# EAGLE board DIY_Keyboard_V1 (EAGLE 9.1.0)

Size 322 x 94 mm. Coordinates in mm from the lower left corner, seen from the top.
Outline: 0,0 322,0 322,94 0,94 0,0
Copper layers (1*16): Top 0.035mm / dielectric 1.5mm / Bottom 0.035mm
Design rules "SparkFun-2-layer-STANDARD *": minimum track width 10mil, minimum drill 20mil, track to track 10mil, track to pad 6mil, pad to pad 6mil, via to via 10mil, smd to smd 8mil, copper to edge 8mil, drill to drill 8mil, minimum pad ring 10mil, minimum via ring 10mil, stop-mask expansion 4mil, vias tented up to drill 20mil, thermal gap 10mil

## Footprints (pad centres in the part's own frame; a part is rotated, then mirrored left to right if it is on the bottom)
QFP80P1200X1200X120-44N = smd 1.473 x 0.508: 1 -5.74,3.988; 2 -5.74,3.2; 3 -5.74,2.388; 4 -5.74,1.6; 5 -5.74,0.787; 6 -5.74,0; 7 -5.74,-0.787; 8 -5.74,-1.6; 9 -5.74,-2.388; 10 -5.74,-3.2; 11 -5.74,-3.988; 23 5.74,-3.988; 24 5.74,-3.2; 25 5.74,-2.388; 26 5.74,-1.6; 27 5.74,-0.787; 28 5.74,0; 29 5.74,0.787; 30 5.74,1.6; 31 5.74,2.388; 32 5.74,3.2; 33 5.74,3.988 | smd 0.508 x 1.473: 12 -3.988,-5.74; 13 -3.2,-5.74; 14 -2.388,-5.74; 15 -1.6,-5.74; 16 -0.787,-5.74; 17 0,-5.74; 18 0.787,-5.74; 19 1.6,-5.74; 20 2.388,-5.74; 21 3.2,-5.74; 22 3.988,-5.74; 34 3.988,5.74; 35 3.2,5.74; 36 2.388,5.74; 37 1.6,5.74; 38 0.787,5.74; 39 0,5.74; 40 -0.787,5.74; 41 -1.6,5.74; 42 -2.388,5.74; 43 -3.2,5.74; 44 -3.988,5.74
0603 = smd 1.1 x 1: 1 -0.85,0; 2 0.85,0
SOD-323 = smd 0.63 x 0.83: A 1.15,0; C -1.15,0
LED-0603 = smd 1 x 1: A -0.877,0; C 0.877,0
2X3 = drill 1.016 pad 1.88: 1 0,0; 2 0,2.54; 3 2.54,0; 4 2.54,2.54; 5 5.08,0; 6 5.08,2.54
CHERRY-MX-LED = drill 1.092 pad 2.032: A -1.27,-5.08; K 1.27,-5.08 | drill 1.753 pad 3.226: S1 -3.81,2.54; S2 2.54,5.08 | hole 4.089: 0,0 | hole 1.707: -5.08,0; 5.08,0
USB_TYPE_C = smd 0.6 x 1.45: A1B12GND -3.25,5.095; A4B9VBUS -2.45,5.095; A9B4VBUS 2.45,5.095; A12B1GND 3.25,5.095 | smd 0.3 x 1.45: A5 -1.25,5.095; A6 -0.25,5.095; A7 0.25,5.095; A8 1.25,5.095; B5 1.75,5.095; B6 0.75,5.095; B7 -0.75,5.095; B8 -1.75,5.095 | drill 0.6 long: P$1 -4.32,0; P$2 4.32,0 | drill 0.6 pad 1 long: P$3 -4.32,4.18; P$4 4.32,4.18 | hole 0.65: -2.89,3.65; 2.89,3.65
CRYSTAL-SMD-5X3.2-4PAD = smd 1.9 x 1.1: 1 -1.85,-1.15; 2 1.85,-1.15; 3 1.85,1.15; 4 -1.85,1.15

## Placement (x,y rotation side)
ATMEGA32U4-AU  ATMEGA32U4-AU  [QFP80P1200X1200X120-44N]  104.73,47 0 top
C1  1.0uF  [0603]  117.5,31 0 top
C2  10pF  [0603]  117.5,28.5 0 top
C3  10pF  [0603]  117.5,26 0 top
D1  250mA/100V  [SOD-323]  313,75.5 0 top
D2  250mA/100V  [SOD-323]  294,75.5 0 top
D3  250mA/100V  [SOD-323]  275,75.5 0 top
D4  250mA/100V  [SOD-323]  256,75.5 0 top
D5  250mA/100V  [SOD-323]  237,75.5 0 top
D6  250mA/100V  [SOD-323]  218,75.5 0 top
D7  250mA/100V  [SOD-323]  199,75.5 0 top
D8  250mA/100V  [SOD-323]  180,75.5 0 top
D9  250mA/100V  [SOD-323]  161,75.5 0 top
D10  250mA/100V  [SOD-323]  142,75.5 0 top
D11  250mA/100V  [SOD-323]  123,75.5 0 top
D12  250mA/100V  [SOD-323]  104,75.5 0 top
D13  250mA/100V  [SOD-323]  85,75.5 0 top
D14  250mA/100V  [SOD-323]  66,75.5 0 top
D15  250mA/100V  [SOD-323]  47,75.5 0 top
D16  250mA/100V  [SOD-323]  28,75.5 0 top
D17  250mA/100V  [SOD-323]  9,75.5 0 top
D18  250mA/100V  [SOD-323]  313,56.5 0 top
D19  250mA/100V  [SOD-323]  294,56.5 0 top
D20  250mA/100V  [SOD-323]  275,56.5 0 top
D21  250mA/100V  [SOD-323]  256,56.5 0 top
D22  250mA/100V  [SOD-323]  237,56.5 0 top
D23  250mA/100V  [SOD-323]  218,56.5 0 top
D24  250mA/100V  [SOD-323]  199,56.5 0 top
D25  250mA/100V  [SOD-323]  180,56.5 0 top
D26  250mA/100V  [SOD-323]  161,56.5 0 top
D27  250mA/100V  [SOD-323]  142,56.5 0 top
D28  250mA/100V  [SOD-323]  123,56.5 0 top
D29  250mA/100V  [SOD-323]  104,56.5 0 top
D30  250mA/100V  [SOD-323]  85,56.5 0 top
D31  250mA/100V  [SOD-323]  66,56.5 0 top
D32  250mA/100V  [SOD-323]  47,56.5 0 top
D33  250mA/100V  [SOD-323]  28,56.5 0 top
D34  250mA/100V  [SOD-323]  9,56.5 0 top
D35  250mA/100V  [SOD-323]  310.25,37.5 0 top
D36  250mA/100V  [SOD-323]  288.5,37.5 0 top
D37  250mA/100V  [SOD-323]  269.5,37.5 0 top
D38  250mA/100V  [SOD-323]  250.5,37.5 0 top
D39  250mA/100V  [SOD-323]  231.5,37.5 0 top
D40  250mA/100V  [SOD-323]  212.5,37.5 0 top
D41  250mA/100V  [SOD-323]  193.5,37.5 0 top
D42  250mA/100V  [SOD-323]  174.5,37.5 0 top
D43  250mA/100V  [SOD-323]  155.5,37.5 0 top
D44  250mA/100V  [SOD-323]  136.5,37.5 0 top
D45  250mA/100V  [SOD-323]  117.5,37.5 0 top
D46  250mA/100V  [SOD-323]  91.75,37.5 0 top
D47  250mA/100V  [SOD-323]  66,37.5 0 top
D48  250mA/100V  [SOD-323]  47,37.5 0 top
D49  250mA/100V  [SOD-323]  28,37.5 0 top
D50  250mA/100V  [SOD-323]  9,37.5 0 top
D51  250mA/100V  [SOD-323]  306.25,18.5 0 top
D52  250mA/100V  [SOD-323]  280.5,18.5 0 top
D53  250mA/100V  [SOD-323]  261.5,18.5 0 top
D54  250mA/100V  [SOD-323]  242.5,18.5 0 top
D55  250mA/100V  [SOD-323]  223.5,18.5 0 top
D56  250mA/100V  [SOD-323]  204.5,18.5 0 top
D57  250mA/100V  [SOD-323]  185.5,18.5 0 top
D58  250mA/100V  [SOD-323]  166.5,18.5 0 top
D59  250mA/100V  [SOD-323]  147.5,18.5 0 top
D60  250mA/100V  [SOD-323]  128.5,18.5 0 top
D61  250mA/100V  [SOD-323]  106.75,18.5 0 top
D62  250mA/100V  [SOD-323]  85,18.5 0 top
D63  250mA/100V  [SOD-323]  66,18.5 0 top
D64  250mA/100V  [SOD-323]  47,18.5 0 top
D65  250mA/100V  [SOD-323]  28,18.5 0 top
D66  250mA/100V  [SOD-323]  9,18.5 0 top
D67  250mA/100V  [SOD-323]  310.25,18.5 0 top
D68  250mA/100V  [SOD-323]  288.5,18.5 0 top
D69  250mA/100V  [SOD-323]  269.5,18.5 0 top
D70  250mA/100V  [SOD-323]  250.5,18.5 0 top
D71  250mA/100V  [SOD-323]  228,18.5 0 top
D72  250mA/100V  [SOD-323]  181,18.5 0 top
D73  250mA/100V  [SOD-323]  152,18.5 0 top
D74  250mA/100V  [SOD-323]  133,18.5 0 top
D75  250mA/100V  [SOD-323]  111.5,18.5 0 top
D76  250mA/100V  [SOD-323]  89.5,18.5 0 top
D77  250mA/100V  [SOD-323]  56.5,18.5 0 top
D78  250mA/100V  [SOD-323]  32.5,18.5 0 top
D79  250mA/100V  [SOD-323]  13.5,18.5 0 top
D80  WHITE  [LED-0603]  299.5,47 90 bottom
ISP  [2X3]  81.39,41.43 90 top
R1  22  [0603]  96,33.5 0 top
R2  22  [0603]  96,31 0 top
R3  56k  [0603]  96,28.5 0 top
R4  56k  [0603]  96,26 0 top
R5  22  [0603]  96,23.5 0 top
S1  MOMENTARY-SWITCH-SPST-LED-PTH-CHERRY  [CHERRY-MX-LED]  313,85 180 bottom
S2  MOMENTARY-SWITCH-SPST-LED-PTH-CHERRY  [CHERRY-MX-LED]  294,85 180 bottom
S3  MOMENTARY-SWITCH-SPST-LED-PTH-CHERRY  [CHERRY-MX-LED]  275,85 180 bottom
S4  MOMENTARY-SWITCH-SPST-LED-PTH-CHERRY  [CHERRY-MX-LED]  256,85 180 bottom
S5  MOMENTARY-SWITCH-SPST-LED-PTH-CHERRY  [CHERRY-MX-LED]  237,85 180 bottom
S6  MOMENTARY-SWITCH-SPST-LED-PTH-CHERRY  [CHERRY-MX-LED]  218,85 180 bottom
S7  MOMENTARY-SWITCH-SPST-LED-PTH-CHERRY  [CHERRY-MX-LED]  199,85 180 bottom
S8  MOMENTARY-SWITCH-SPST-LED-PTH-CHERRY  [CHERRY-MX-LED]  180,85 180 bottom
S9  MOMENTARY-SWITCH-SPST-LED-PTH-CHERRY  [CHERRY-MX-LED]  161,85 180 bottom
S10  MOMENTARY-SWITCH-SPST-LED-PTH-CHERRY  [CHERRY-MX-LED]  142,85 180 bottom
S11  MOMENTARY-SWITCH-SPST-LED-PTH-CHERRY  [CHERRY-MX-LED]  123,85 180 bottom
S12  MOMENTARY-SWITCH-SPST-LED-PTH-CHERRY  [CHERRY-MX-LED]  104,85 180 bottom
S13  MOMENTARY-SWITCH-SPST-LED-PTH-CHERRY  [CHERRY-MX-LED]  85,85 180 bottom
S14  MOMENTARY-SWITCH-SPST-LED-PTH-CHERRY  [CHERRY-MX-LED]  66,85 180 bottom
S15  MOMENTARY-SWITCH-SPST-LED-PTH-CHERRY  [CHERRY-MX-LED]  47,85 180 bottom
S16  MOMENTARY-SWITCH-SPST-LED-PTH-CHERRY  [CHERRY-MX-LED]  28,85 180 bottom
S17  MOMENTARY-SWITCH-SPST-LED-PTH-CHERRY  [CHERRY-MX-LED]  9,85 180 bottom
S18  MOMENTARY-SWITCH-SPST-LED-PTH-CHERRY  [CHERRY-MX-LED]  313,66 180 bottom
S19  MOMENTARY-SWITCH-SPST-LED-PTH-CHERRY  [CHERRY-MX-LED]  294,66 180 bottom
S20  MOMENTARY-SWITCH-SPST-LED-PTH-CHERRY  [CHERRY-MX-LED]  275,66 180 bottom
S21  MOMENTARY-SWITCH-SPST-LED-PTH-CHERRY  [CHERRY-MX-LED]  256,66 180 bottom
S22  MOMENTARY-SWITCH-SPST-LED-PTH-CHERRY  [CHERRY-MX-LED]  237,66 180 bottom
S23  MOMENTARY-SWITCH-SPST-LED-PTH-CHERRY  [CHERRY-MX-LED]  218,66 180 bottom
S24  MOMENTARY-SWITCH-SPST-LED-PTH-CHERRY  [CHERRY-MX-LED]  199,66 180 bottom
S25  MOMENTARY-SWITCH-SPST-LED-PTH-CHERRY  [CHERRY-MX-LED]  180,66 180 bottom
S26  MOMENTARY-SWITCH-SPST-LED-PTH-CHERRY  [CHERRY-MX-LED]  161,66 180 bottom
S27  MOMENTARY-SWITCH-SPST-LED-PTH-CHERRY  [CHERRY-MX-LED]  142,66 180 bottom
S28  MOMENTARY-SWITCH-SPST-LED-PTH-CHERRY  [CHERRY-MX-LED]  123,66 180 bottom
S29  MOMENTARY-SWITCH-SPST-LED-PTH-CHERRY  [CHERRY-MX-LED]  104,66 180 bottom
S30  MOMENTARY-SWITCH-SPST-LED-PTH-CHERRY  [CHERRY-MX-LED]  85,66 180 bottom
S31  MOMENTARY-SWITCH-SPST-LED-PTH-CHERRY  [CHERRY-MX-LED]  66,66 180 bottom
S32  MOMENTARY-SWITCH-SPST-LED-PTH-CHERRY  [CHERRY-MX-LED]  47,66 180 bottom
S33  MOMENTARY-SWITCH-SPST-LED-PTH-CHERRY  [CHERRY-MX-LED]  28,66 180 bottom
S34  MOMENTARY-SWITCH-SPST-LED-PTH-CHERRY  [CHERRY-MX-LED]  9,66 180 bottom
S35  MOMENTARY-SWITCH-SPST-LED-PTH-CHERRY  [CHERRY-MX-LED]  310.25,47 180 bottom
S36  MOMENTARY-SWITCH-SPST-LED-PTH-CHERRY  [CHERRY-MX-LED]  288.5,47 180 bottom
S37  MOMENTARY-SWITCH-SPST-LED-PTH-CHERRY  [CHERRY-MX-LED]  269.5,47 180 bottom
S38  MOMENTARY-SWITCH-SPST-LED-PTH-CHERRY  [CHERRY-MX-LED]  250.5,47 180 bottom
S39  MOMENTARY-SWITCH-SPST-LED-PTH-CHERRY  [CHERRY-MX-LED]  231.5,47 180 bottom
S40  MOMENTARY-SWITCH-SPST-LED-PTH-CHERRY  [CHERRY-MX-LED]  212.5,47 180 bottom
S41  MOMENTARY-SWITCH-SPST-LED-PTH-CHERRY  [CHERRY-MX-LED]  193.5,47 180 bottom
S42  MOMENTARY-SWITCH-SPST-LED-PTH-CHERRY  [CHERRY-MX-LED]  174.5,47 180 bottom
S43  MOMENTARY-SWITCH-SPST-LED-PTH-CHERRY  [CHERRY-MX-LED]  155.5,47 180 bottom
S44  MOMENTARY-SWITCH-SPST-LED-PTH-CHERRY  [CHERRY-MX-LED]  136.5,47 180 bottom
S45  MOMENTARY-SWITCH-SPST-LED-PTH-CHERRY  [CHERRY-MX-LED]  117.5,47 180 bottom
S46  MOMENTARY-SWITCH-SPST-LED-PTH-CHERRY  [CHERRY-MX-LED]  91.75,47 180 bottom
S47  MOMENTARY-SWITCH-SPST-LED-PTH-CHERRY  [CHERRY-MX-LED]  66,47 180 bottom
S48  MOMENTARY-SWITCH-SPST-LED-PTH-CHERRY  [CHERRY-MX-LED]  47,47 180 bottom
S49  MOMENTARY-SWITCH-SPST-LED-PTH-CHERRY  [CHERRY-MX-LED]  28,47 180 bottom
S50  MOMENTARY-SWITCH-SPST-LED-PTH-CHERRY  [CHERRY-MX-LED]  9,47 180 bottom
S51  MOMENTARY-SWITCH-SPST-LED-PTH-CHERRY  [CHERRY-MX-LED]  306.25,28 180 bottom
S52  MOMENTARY-SWITCH-SPST-LED-PTH-CHERRY  [CHERRY-MX-LED]  280.5,28 180 bottom
S53  MOMENTARY-SWITCH-SPST-LED-PTH-CHERRY  [CHERRY-MX-LED]  261.5,28 180 bottom
S54  MOMENTARY-SWITCH-SPST-LED-PTH-CHERRY  [CHERRY-MX-LED]  242.5,28 180 bottom
S55  MOMENTARY-SWITCH-SPST-LED-PTH-CHERRY  [CHERRY-MX-LED]  223.5,28 180 bottom
S56  MOMENTARY-SWITCH-SPST-LED-PTH-CHERRY  [CHERRY-MX-LED]  204.5,28 180 bottom
S57  MOMENTARY-SWITCH-SPST-LED-PTH-CHERRY  [CHERRY-MX-LED]  185.5,28 180 bottom
S58  MOMENTARY-SWITCH-SPST-LED-PTH-CHERRY  [CHERRY-MX-LED]  166.5,28 180 bottom
S59  MOMENTARY-SWITCH-SPST-LED-PTH-CHERRY  [CHERRY-MX-LED]  147.5,28 180 bottom
S60  MOMENTARY-SWITCH-SPST-LED-PTH-CHERRY  [CHERRY-MX-LED]  128.5,28 180 bottom
S61  MOMENTARY-SWITCH-SPST-LED-PTH-CHERRY  [CHERRY-MX-LED]  106.75,28 180 bottom
S62  MOMENTARY-SWITCH-SPST-LED-PTH-CHERRY  [CHERRY-MX-LED]  85,28 180 bottom
S63  MOMENTARY-SWITCH-SPST-LED-PTH-CHERRY  [CHERRY-MX-LED]  66,28 180 bottom
S64  MOMENTARY-SWITCH-SPST-LED-PTH-CHERRY  [CHERRY-MX-LED]  47,28 180 bottom
S65  MOMENTARY-SWITCH-SPST-LED-PTH-CHERRY  [CHERRY-MX-LED]  28,28 180 bottom
S66  MOMENTARY-SWITCH-SPST-LED-PTH-CHERRY  [CHERRY-MX-LED]  9,28 180 bottom
S67  MOMENTARY-SWITCH-SPST-LED-PTH-CHERRY  [CHERRY-MX-LED]  310.25,9 180 bottom
S68  MOMENTARY-SWITCH-SPST-LED-PTH-CHERRY  [CHERRY-MX-LED]  288.5,9 180 bottom
S69  MOMENTARY-SWITCH-SPST-LED-PTH-CHERRY  [CHERRY-MX-LED]  269.5,9 180 bottom
S70  MOMENTARY-SWITCH-SPST-LED-PTH-CHERRY  [CHERRY-MX-LED]  250.5,9 180 bottom
S71  MOMENTARY-SWITCH-SPST-LED-PTH-CHERRY  [CHERRY-MX-LED]  224.75,9 180 bottom
S72  MOMENTARY-SWITCH-SPST-LED-PTH-CHERRY  [CHERRY-MX-LED]  182.75,9 180 bottom
S73  MOMENTARY-SWITCH-SPST-LED-PTH-CHERRY  [CHERRY-MX-LED]  147.5,9 180 bottom
S74  MOMENTARY-SWITCH-SPST-LED-PTH-CHERRY  [CHERRY-MX-LED]  128.5,9 180 bottom
S75  MOMENTARY-SWITCH-SPST-LED-PTH-CHERRY  [CHERRY-MX-LED]  109.5,9 180 bottom
S76  MOMENTARY-SWITCH-SPST-LED-PTH-CHERRY  [CHERRY-MX-LED]  87.75,9 180 bottom
S77  MOMENTARY-SWITCH-SPST-LED-PTH-CHERRY  [CHERRY-MX-LED]  56.5,9 180 bottom
S78  MOMENTARY-SWITCH-SPST-LED-PTH-CHERRY  [CHERRY-MX-LED]  28,9 180 bottom
S79  MOMENTARY-SWITCH-SPST-LED-PTH-CHERRY  [CHERRY-MX-LED]  9,9 180 bottom
U$1  USB_TYPE_C  [USB_TYPE_C]  18.5,92 180 top
Y1  16MHz  [CRYSTAL-SMD-5X3.2-4PAD]  79.82,51.78 90 top

## Library data of the parts
ATMEGA32U4-AU = ATMEGA32U4-AU; AVAILABILITY: Unavailable; DESCRIPTION: MCU 8-bit ATmega AVR RISC 32KB Flash 3.3V/5V 44-Pin TQFP; MF: Microchip; MP: ATMEGA32U4-AU; PACKAGE: TQFP-44 Microchip; PRICE: None
C1 = SparkFun-Capacitors; PROD_ID: CAP-00868
C2 C3 = SparkFun-Capacitors; PROD_ID: CAP-11812
D1-D79 = SparkFun-DiscreteSemi; PROD_ID: DIO-09646
D80 = SparkFun-LED; PROD_ID: DIO-09004
ISP = SparkFun-Connectors; PROD_ID: CONN-11566
R1 R2 R5 = SparkFun-Resistors; PROD_ID: RES-08698
R3 R4 = SparkFun-Resistors
S1-S79 = SparkFun-Switches; SF_ID: COM-13834
U$1 = USB-TYPE-C-V2
Y1 = SparkFun-Clocks; PROD_ID: XTAL-08218; SF_ID: COM-00094

## Nets
C1: ATMEGA32U4-AU.8 D1.C D18.C D35.C D51.C D67.C
C2: ATMEGA32U4-AU.9 D2.C D19.C D36.C D52.C D68.C ISP.3
C3: ATMEGA32U4-AU.10 D3.C D20.C D37.C D53.C D69.C ISP.4
C4: ATMEGA32U4-AU.11 D4.C D21.C D38.C D54.C D70.C ISP.1
C5: ATMEGA32U4-AU.28 D5.C D22.C D39.C D55.C D71.C
C6: ATMEGA32U4-AU.29 D6.C D23.C D40.C D56.C D72.C
C7: ATMEGA32U4-AU.30 D7.C D24.C D41.C D57.C D73.C
C8: ATMEGA32U4-AU.12 D8.C D25.C D42.C D58.C D74.C
C9: ATMEGA32U4-AU.31 D9.C D26.C D43.C D59.C D75.C
C10: ATMEGA32U4-AU.32 D10.C D27.C D44.C D60.C D76.C
C11: ATMEGA32U4-AU.18 D11.C D28.C D45.C D61.C D77.C
C12: ATMEGA32U4-AU.19 D12.C D29.C D46.C D62.C D78.C
C13: ATMEGA32U4-AU.20 D13.C D30.C D47.C D63.C D79.C
C14: ATMEGA32U4-AU.21 D14.C D31.C D48.C D64.C
C15: ATMEGA32U4-AU.25 D15.C D32.C D49.C D65.C
C16: ATMEGA32U4-AU.22 D16.C D33.C D50.C D66.C
C17: ATMEGA32U4-AU.27 D17.C D34.C
GND: ATMEGA32U4-AU.5 ATMEGA32U4-AU.15 ATMEGA32U4-AU.23 ATMEGA32U4-AU.35 ATMEGA32U4-AU.43 C1.2 C2.2 C3.2 D80.C ISP.6 R3.2 R4.2 U$1.A1B12GND U$1.A12B1GND
N$1: D1.A S1.S2
N$2: D2.A S2.S2
N$3: D3.A S3.S2
N$4: D4.A S4.S2
N$5: D5.A S5.S2
N$6: D6.A S6.S2
N$7: D7.A S7.S2
N$8: D8.A S8.S2
N$9: D9.A S9.S2
N$10: D10.A S10.S2
N$11: D11.A S11.S2
N$12: D12.A S12.S2
N$13: D13.A S13.S2
N$14: D14.A S14.S2
N$15: D15.A S15.S2
N$16: D16.A S16.S2
N$17: D17.A S17.S2
N$18: D18.A S18.S2
N$19: D19.A S19.S2
N$20: D20.A S20.S2
N$21: D21.A S21.S2
N$22: D22.A S22.S2
N$23: D23.A S23.S2
N$24: D24.A S24.S2
N$25: D25.A S25.S2
N$26: D26.A S26.S2
N$27: D27.A S27.S2
N$28: D28.A S28.S2
N$29: D29.A S29.S2
N$30: D30.A S30.S2
N$31: D31.A S31.S2
N$32: D32.A S32.S2
N$33: D33.A S33.S2
N$34: D34.A S34.S2
N$35: D35.A S35.S2
N$36: D36.A S36.S2
N$37: D37.A S37.S2
N$38: D38.A S38.S2
N$39: D39.A S39.S2
N$40: D40.A S40.S2
N$41: D41.A S41.S2
N$42: D42.A S42.S2
N$43: D43.A S43.S2
N$44: D44.A S44.S2
N$45: D45.A S45.S2
N$46: D46.A S46.S2
N$47: D47.A S47.S2
N$48: D48.A S48.S2
N$49: D49.A S49.S2
N$50: D50.A S50.S2
N$51: D51.A S51.S2
N$52: D52.A S52.S2
N$53: D53.A S53.S2
N$54: D54.A S54.S2
N$55: D55.A S55.S2
N$56: D56.A S56.S2
N$57: D57.A S57.S2
N$58: D58.A S58.S2
N$59: D59.A S59.S2
N$60: D60.A S60.S2
N$61: D61.A S61.S2
N$62: D62.A S62.S2
N$63: D63.A S63.S2
N$64: D64.A S64.S2
N$65: D65.A S65.S2
N$66: D66.A S66.S2
N$67: D67.A S67.S2
N$68: D68.A S68.S2
N$69: D69.A S69.S2
N$70: D70.A S70.S2
N$71: D71.A S71.S2
N$72: D72.A S72.S2
N$73: D73.A S73.S2
N$74: D74.A S74.S2
N$75: D75.A S75.S2
N$76: D76.A S76.S2
N$77: D77.A S77.S2
N$78: D78.A S78.S2
N$79: D79.A S79.S2
N$80: ATMEGA32U4-AU.3 R1.2
N$81: ATMEGA32U4-AU.4 R2.2
N$82: R1.1 U$1.A7 U$1.B7
N$83: ATMEGA32U4-AU.2 ATMEGA32U4-AU.7 ATMEGA32U4-AU.14 ATMEGA32U4-AU.24 ATMEGA32U4-AU.34 ATMEGA32U4-AU.44 C1.1 ISP.2 U$1.A4B9VBUS U$1.A9B4VBUS
N$84: R2.1 U$1.A6 U$1.B6
N$85: ATMEGA32U4-AU.13 ISP.5
N$86: ATMEGA32U4-AU.16 C3.1 Y1.3
N$87: ATMEGA32U4-AU.17 C2.1 Y1.1
N$88: R3.1 U$1.A5
N$89: R4.1 U$1.B5
N$90: ATMEGA32U4-AU.33 R5.1
N$91: D80.A R5.2
R1: ATMEGA32U4-AU.41 S1.S1 S2.S1 S3.S1 S4.S1 S5.S1 S6.S1 S7.S1 S8.S1 S9.S1 S10.S1 S11.S1 S12.S1 S13.S1 S14.S1 S15.S1 S16.S1 S17.S1
R2: ATMEGA32U4-AU.40 S18.S1 S19.S1 S20.S1 S21.S1 S22.S1 S23.S1 S24.S1 S25.S1 S26.S1 S27.S1 S28.S1 S29.S1 S30.S1 S31.S1 S32.S1 S33.S1 S34.S1
R3: ATMEGA32U4-AU.39 S35.S1 S36.S1 S37.S1 S38.S1 S39.S1 S40.S1 S41.S1 S42.S1 S43.S1 S44.S1 S45.S1 S46.S1 S47.S1 S48.S1 S49.S1 S50.S1
R4: ATMEGA32U4-AU.38 S51.S1 S52.S1 S53.S1 S54.S1 S55.S1 S56.S1 S57.S1 S58.S1 S59.S1 S60.S1 S61.S1 S62.S1 S63.S1 S64.S1 S65.S1 S66.S1
R5: ATMEGA32U4-AU.37 S67.S1 S68.S1 S69.S1 S70.S1 S71.S1 S72.S1 S73.S1 S74.S1 S75.S1 S76.S1 S77.S1 S78.S1 S79.S1
UCAP: ATMEGA32U4-AU.6

## Tracks (layer width: path | path; a pad name or v marks a point on that pad's centre or on a via)
C1  (5 unrouted)
C2  (6 unrouted)
C3  (6 unrouted)
C4  (6 unrouted)
C5  (5 unrouted)
C6  (5 unrouted)
C7  (5 unrouted)
C8  (5 unrouted)
C9  (5 unrouted)
C10  (5 unrouted)
C11  (5 unrouted)
C12  (5 unrouted)
C13  (5 unrouted)
C14  (4 unrouted)
C15  (4 unrouted)
C16  (4 unrouted)
C17  (2 unrouted)
GND  (13 unrouted)
N$1  (1 unrouted)
N$2  (1 unrouted)
N$3  (1 unrouted)
N$4  (1 unrouted)
N$5  (1 unrouted)
N$6  (1 unrouted)
N$7  (1 unrouted)
N$8  (1 unrouted)
N$9  (1 unrouted)
N$10  (1 unrouted)
N$11  (1 unrouted)
N$12  (1 unrouted)
N$13  (1 unrouted)
N$14  (1 unrouted)
N$15  (1 unrouted)
N$16  (1 unrouted)
N$17  (1 unrouted)
N$18  (1 unrouted)
N$19  (1 unrouted)
N$20  (1 unrouted)
N$21  (1 unrouted)
N$22  (1 unrouted)
N$23  (1 unrouted)
N$24  (1 unrouted)
N$25  (1 unrouted)
N$26  (1 unrouted)
N$27  (1 unrouted)
N$28  (1 unrouted)
N$29  (1 unrouted)
N$30  (1 unrouted)
N$31  (1 unrouted)
N$32  (1 unrouted)
N$33  (1 unrouted)
N$34  (1 unrouted)
N$35  (1 unrouted)
N$36  (1 unrouted)
N$37  (1 unrouted)
N$38  (1 unrouted)
N$39  (1 unrouted)
N$40  (1 unrouted)
N$41  (1 unrouted)
N$42  (1 unrouted)
N$43  (1 unrouted)
N$44  (1 unrouted)
N$45  (1 unrouted)
N$46  (1 unrouted)
N$47  (1 unrouted)
N$48  (1 unrouted)
N$49  (1 unrouted)
N$50  (1 unrouted)
N$51  (1 unrouted)
N$52  (1 unrouted)
N$53  (1 unrouted)
N$54  (1 unrouted)
N$55  (1 unrouted)
N$56  (1 unrouted)
N$57  (1 unrouted)
N$58  (1 unrouted)
N$59  (1 unrouted)
N$60  (1 unrouted)
N$61  (1 unrouted)
N$62  (1 unrouted)
N$63  (1 unrouted)
N$64  (1 unrouted)
N$65  (1 unrouted)
N$66  (1 unrouted)
N$67  (1 unrouted)
N$68  (1 unrouted)
N$69  (1 unrouted)
N$70  (1 unrouted)
N$71  (1 unrouted)
N$72  (1 unrouted)
N$73  (1 unrouted)
N$74  (1 unrouted)
N$75  (1 unrouted)
N$76  (1 unrouted)
N$77  (1 unrouted)
N$78  (1 unrouted)
N$79  (1 unrouted)
N$80  (1 unrouted)
N$81  (1 unrouted)
N$82  (2 unrouted)
N$83  (9 unrouted)
N$84  (2 unrouted)
N$85  (1 unrouted)
N$86  (2 unrouted)
N$87  (2 unrouted)
N$88  (1 unrouted)
N$89  (1 unrouted)
N$90  (1 unrouted)
N$91  (1 unrouted)
R1  (17 unrouted)
R2  (17 unrouted)
R3  (16 unrouted)
R4  (16 unrouted)
R5  (13 unrouted)

## Text on the board
tNames: Capacitor_Land | Resistor_Land | Shelby_Tech\ | Mech-E_V1.0